# Altium PCB TIDA-01486E1_PCB.PcbDoc (part 3 of 3)
Units mil, origin at the board's own origin, x right, y up, seen from the top; angles counter-clockwise.
Board outline 4100 x 3000 mil, 4 copper layers (Top Layer, Signal Layer 1, Signal Layer 2, Bottom Layer), stack 61.6 mil thick; 140 components, 71 nets, 368 pads, 137 vias.
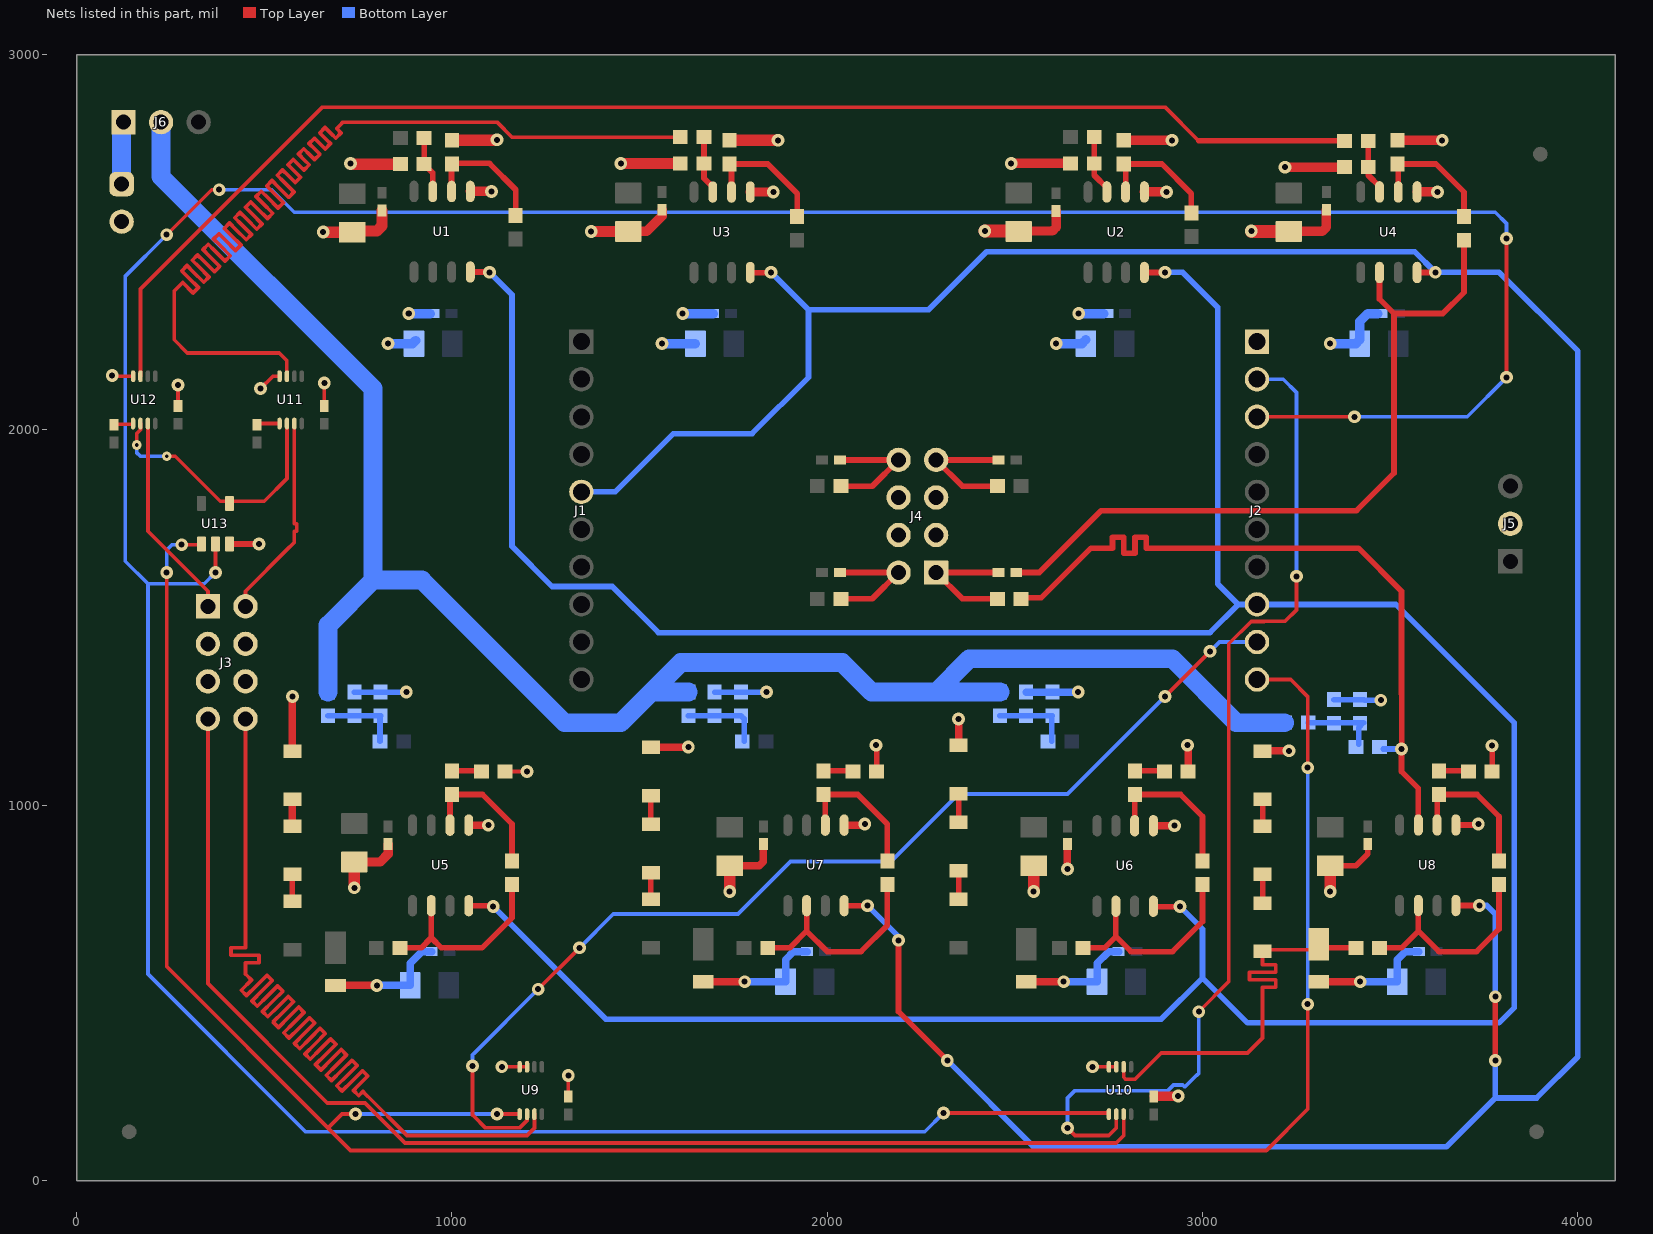
[diagram p4: the nets of this part, all layers, seen from the top]

## Via types
v1: diameter 34, hole 16, Top Layer to Bottom Layer, 129 vias
v2: diameter 40, hole 20, Top Layer to Bottom Layer, 6 vias
v3: diameter 26, hole 10, Top Layer to Bottom Layer, 2 vias

## Nets (pads, with @x,y where several pads share a name; then routed paths per layer and width w, separated by ;. In a path a pad name is that pad's centre, name@x,y a point inside that pad or via, vN(x,y) a via of type N, cw(c..) or ccw(c..) an arc to the next point about the centre after c; other vN are vias at no path point) (continued)
CH2_T: C3.2 U11.3 | length 3678.5
  Top Layer w10: U11.3@560,2143 560,2185 540,2205 295,2205 260,2240 260,2370 282.81,2392.81 310.55,2365.06 324.69,2379.2 296.95,2406.95 280.13,2423.77 294.27,2437.92 311.09,2421.09 338.84,2393.35 352.98,2407.49 325.23,2435.23 308.41,2452.06 322.55,2466.2 339.38,2449.38 367.12,2421.63 381.26,2435.77 353.52,2463.52 336.69,2480.34 350.84,2494.48 367.66,2477.66 395.41,2449.91 409.55,2464.06 381.8,2491.8 364.98,2508.63 379.12,2522.77 395.94,2505.94 423.69,2478.2 437.83,2492.34 410.09,2520.09 393.26,2536.91 407.4,2551.05 424.23,2534.23 451.97,2506.48 466.12,2520.62 438.37,2548.37 421.55,2565.19 435.69,2579.34 452.51,2562.51 480.26,2534.77 494.4,2548.91 466.65,2576.65 449.83,2593.48 463.97,2607.62 480.8,2590.8 508.54,2563.05 522.68,2577.19 494.94,2604.94 478.12,2621.76 492.26,2635.9 509.08,2619.08 536.83,2591.34 550.97,2605.48 523.22,2633.22 506.4,2650.05 520.54,2664.19 537.37,2647.37 565.11,2619.62 579.25,2633.76 551.51,2661.51 534.68,2678.33 548.83,2692.47 565.65,2675.65 582.45,2658.85 596.59,2672.99 579.79,2689.79 562.97,2706.62 577.11,2720.76 593.93,2703.93 605.76,2692.11 619.9,2706.25 608.08,2718.08 591.25,2734.9 605.39,2749.04 622.22,2732.22 634.04,2720.39 648.18,2734.54 636.36,2746.36 619.54,2763.18 633.68,2777.33 650.5,2760.5 662.33,2748.68 676.47,2762.82 664.64,2774.64 647.82,2791.47 661.96,2805.61 678.79,2788.79 690.61,2776.96 704.75,2791.11 692.93,2802.93 700,2810 710,2820 1120,2820 1160,2780 C3.2@1608.5,2780
CH3_IN: C23.2 R32.2 U8.3 | length 1955.1
  Top Layer w15: C23.2@2516.5,1550 2516.5,1552.37 2570,1552.37 2702.63,1685 2745,1685 2760,1685 2760,1714.5 2790,1714.5 2790,1685 2790,1670.96 2820,1670.96 2820,1685 2820,1714.5 2850,1714.5 2850,1685 2995,1685 3415,1685 3530,1570 3530,1296.66 3530.88,1295.78 3530.88,1150.88 v1(3530,1150) 3530,1090 3575,1045 U8.3@3575,947.28
  Bottom Layer w15: R32.2@3481.5,1150 v1(3530,1150)
CH3_OUT: R8.2 R35.1 U4.6 | length 2015.3
  Top Layer w15: R35.1@2503.62,1620 2565,1620 2730,1785 3410,1785 3510,1885 3510,2310 ; U4.6@3471.5,2419.52 3471.5,2348.5 3510,2310 ; R8.2@3696.5,2505.31 3696.5,2366.5 3640,2310 3510,2310
CH3_R: D4.1 D14.2 R42.2 U10.2 | length 1140.6
  Top Layer w10: U10.2@2789.84,302.99 2789.84,275.16 2795,270 2820,270 2890,340 3120,340 3160,380 3160,405 3160,515 3194.89,515 3194.89,535 3160,535 3125.11,535 3125.11,555 3160,555 3194.89,555 3194.89,575 3160,575 3160,585 3160,615 D4.1@3315.2,615
  Top Layer w15: D4.1@3315.2,615 3320.2,620 R42.2@3408.5,620
CH3_T: C4.2 U12.3 | length 3678.2
  Top Layer w10: U12.3@170.47,2143.31 170.47,2375.47 655,2860 2900,2860 2990,2770
  Top Layer w15: 2990,2770 C4.2@3378.5,2770
EVM_CH0_IN: J3.8 U9.7 | length 3386.3
  Top Layer w10: J3.8@450,1230 450,1020 450,620 411.68,620 411.68,600 450,600 486.07,600 486.07,580 450,580 450,560 450,550 451.8,548.2 465.94,534.06 438.85,506.96 452.99,492.82 480.09,519.91 507.18,547.01 521.32,532.87 494.23,505.77 467.13,478.68 481.28,464.54 508.37,491.63 535.46,518.72 549.61,504.58 522.51,477.49 495.42,450.39 509.56,436.25 536.65,463.35 563.75,490.44 577.89,476.3 550.8,449.2 523.7,422.11 537.84,407.97 564.94,435.06 592.03,462.16 606.18,448.01 579.08,420.92 551.99,393.82 566.13,379.68 593.22,406.78 620.32,433.87 634.46,419.73 607.37,392.63 580.27,365.54 594.41,351.4 621.51,378.49 648.6,405.59 662.74,391.44 635.65,364.35 608.56,337.26 622.7,323.11 649.79,350.21 676.89,377.3 691.03,363.16 663.93,336.07 636.84,308.97 650.98,294.83 678.08,321.92 705.17,349.02 719.31,334.88 692.22,307.78 665.12,280.69 679.27,266.55 706.36,293.64 733.45,320.73 747.6,306.59 720.5,279.5 693.41,252.4 707.55,238.26 734.64,265.36 761.74,292.45 775.88,278.31 748.79,251.21 737.66,240.09 751.8,225.94 762.93,237.07 770,230 775.24,224.76 775.52,224.76 880.28,120 1200,120 1219.84,139.84 U9.7@1219.84,177.01
EVM_CH0_OUT: J3.2 U11.7 | length 553.2
  Top Layer w10: J3.2@450,1530 450,1570 565,1685 572.07,1692.07 580.16,1700.16 580.16,1710.16 580.16,1730.16 586.31,1730.16 586.31,1750.16 580.16,1750.16 580.16,1815 U11.7@580.16,2017.01
EVM_CH1_IN: J3.7 U10.7 | length 3386.3
  Top Layer w10: J3.7@350,1230 350,525 668.12,206.88 768.12,206.88 875,100 2770,100 2789.84,119.84 U10.7@2789.84,177.01
EVM_CH1_OUT: J3.1 U12.7 | length 553.2
  Top Layer w10: U12.7@190.16,2017.01 190.16,1729.84 350,1570 J3.1@350,1530
EXT_VBIAS: J6.1 J7.1 | length 167.1
  Bottom Layer w50: J7.1@120,2655 120,2815 J6.1@125,2820
GND: C9.2 C10.2 C11.2 C12.2 C13.2 C14.2 C15.2 C16.2 C17.2 C18.2 C19.2 C20.2 C27.1 C28.1 C29.1 C30.1 C31.2 C32.2 C33.2 C34.2 C35.2 C36.2 C37.2 C38.2 C39.2 C40.1 C41.2 C42.1 C43.2 C44.1 C45.2 C46.1 C47.2 C48.2 C49.2 C50.2 C51.2 C52.2 C53.2 C54.2 C55.2 C56.2 C57.2 C58.2 D1.2 D2.2 D3.2 D4.2 D7.1 D10.1 D13.1 D16.1 J2.1 J3.3 J3.4 J3.5 J3.6 J4.3 J4.4 J4.5 J4.6 J5.2 J7.2 R1.1 R2.1 R3.1 R4.1 R9.1 R10.1 R11.1 R12.1 R25.1 R26.1 R27.1 R28.1 U1.1 U2.1 U3.1 U4.1 U5.1 U6.1 U7.1 U8.1 U9.3 U9.4 U10.3 U10.4 U11.4 U12.4 U13.3 | length 6917.7
  Top Layer w10: v1@85,2142.99 U12.4@150.47,2142.99 ; C56.2@270,2063.62 v1(270,2120) ; v1(490,2110) 522.99,2142.99 U11.4@540.79,2142.99 ; C55.2@660,2063.62 v1(660,2125) ; v1(1132.99,302.99) U9.4@1180.47,302.99 U9.3@1200.16,302.99 ; C47.2@1141.5,1090 v1(1200,1090) ; C57.2@1310,223.62 v1(1310,280) ; v1(2707.01,302.99) U10.4@2750.47,302.99 U10.3@2770.16,302.99
  Top Layer w15: U13.3@407.4,1695.87 v1(485.87,1695.87) ; v1(2130,1160) 2131.5,1158.5 C49.2@2131.5,1090 ; C58.2@2870,223.62 C58.2@2871.38,225 ; C46.1@3340,838.82 3408.82,838.82 3440,870 C45.2@3440,896.38 ; U8.1@3675,947.28 v1@3737.28,947.28 ; C50.2@3771.5,1090 v1(3771.5,1158.5)
  Top Layer w20: D7.1@575,1150 v1(575,1290) ; D1.2@690,519.8 v1(800,519.8) ; U5.1@1045,946.97 v1(1096.97,946.97) ; D13.1@1530,1154.47 1629.47,1154.47 v1(1630,1155) ; D3.2@1670,529.8 v1@1779.8,529.8 ; C44.1@1740,838.82 1818.82,838.82 1830,850 C43.2@1830,896.38 ; U7.1@2045,946.97 v1@2096.97,946.97 ; D10.1@2350,1158.74 v1(2350,1230) ; D2.2@2530,529.8 v1@2629.8,529.8 ; v1(2640,830) C41.2@2640,896.38 ; U6.1@2869.04,945.43 v1(2925.43,945.43) ; C48.2@2961.5,1090 v1@2961.5,1158.5 ; D16.1@3170.53,1145 v1@3225,1145 ; D4.2@3310,529.8 3310.2,530 v1(3420,530)
  Top Layer w25: C40.1@740,848.82 808.82,848.82 830,870 C39.2@830,896.38 ; U1.1@1049.04,2635.43 v1(1105.43,2635.43) ; C29.1@1470,2528.82 1518.82,2528.82 1560,2570 C14.2@1560,2586.38 ; U3.1@1795,2633.77 v1(1856.23,2633.77) ; v1(2490,2710) R2.1@2648.5,2710 ; C28.1@2508.82,2530 2600,2530 2610,2540 C12.2@2610,2583.18 ; R10.1@2800,2771.5 v1(2918.5,2771.5) ; U2.1@2845,2634.09 v1(2904.09,2634.09) ; C58.2@2871.38,225 v1(2935,225) ; v1(3220,2700) R4.1@3378.5,2700 ; C30.1@3230,2528.82 3318.82,2528.82 3330,2540 C16.2@3330,2586.38 ; R12.1@3520,2771.5 v1(3638.5,2771.5) ; U4.1@3571.5,2634.09 v1(3625.91,2634.09)
  Top Layer w30: v1(656.97,2526.97) C27.1@734.36,2526.97 737.39,2530 800,2530 814.04,2544.04 C10.2@814.04,2584.84 ; v1(730,2710) 731.85,2708.15 R1.1@862.86,2708.15 ; v1(740,780) C40.1@740,848.82 ; R9.1@1000,2771.5 1118.5,2771.5 v1(1120,2772.99) ; v1(1371.18,2528.82) C29.1@1470,2528.82 ; v1(1450,2710) R3.1@1608.5,2710 ; v1(1740,770) C44.1@1740,838.82 ; R11.1@1740,2771.5 v1(1868.5,2771.5) ; v1(2550,770) C42.1@2550,838.82 ; v1(3340,770) C46.1@3340,838.82
  Top Layer w35: v1(2420,2530) C28.1@2508.82,2530 ; v1@3131.18,2528.82 C30.1@3230,2528.82
  Bottom Layer w15: R25.1@740,1301.5 C51.2@810,1301.5 v1(878.5,1301.5) ; R27.1@1700,1301.5 v1(1838.5,1301.5) ; R28.1@3350.07,1281.5 3430.26,1281.5 3431.75,1280 v1(3475,1280)
  Bottom Layer w20: v1(800,519.8) 888.62,519.8 C35.2@888.82,520 888.82,578.82 920,610 C17.2@946.38,610 ; v1(1780,530) C37.2@1888.82,530 1888.82,588.82 1910,610 C19.2@1946.38,610 ; R26.1@2530,1301.5 v1(2668.5,1301.5) ; v1(2630,530) C36.2@2718.82,530 2718.82,578.82 2750,610 C18.2@2776.38,610 ; v1(3420,530) C38.2@3518.82,530 3518.82,588.82 3540,610 C20.2@3576.38,610
  Bottom Layer w25: v1(830,2230) 895.03,2230 C31.2@903.18,2238.15 ; v1(885,2310) C9.2@942.59,2310 ; v1(1560,2230) C33.2@1648.82,2230 ; v1(1615,2310) C13.2@1696.38,2310 ; v1(2610,2230) 2678.82,2230 C32.2@2688.82,2240 ; v1(2670,2310) C11.2@2736.38,2310 ; v1(3340,2230) 3408.82,2230 3418.82,2240 3418.82,2288.82 3440,2310 C15.2@3466.38,2310
  other v1: 2100,950 3734.57,950 3230,1145 2960,1160 95,2145 3130,2530
NetC1_1: C1.1 R1.2 U1.3 | length 152.3
  Top Layer w15: C1.1@925.85,2778.15 R1.2@925.85,2708.15 949.04,2684.96 U1.3@949.04,2635.43
NetC2_1: C2.1 R2.2 U2.3 | length 159.8
  Top Layer w15: C2.1@2711.5,2780 R2.2@2711.5,2710 2711.5,2678.5 2745,2645 U2.3@2745,2634.09
NetC3_1: C3.1 R3.2 U3.3 | length 156
  Top Layer w15: C3.1@1671.5,2780 R3.2@1671.5,2710 1671.5,2670.66 1695,2647.16 U3.3@1695,2633.77
NetC4_1: C4.1 R4.2 U4.3 | length 148.3
  Top Layer w15: C4.1@3441.5,2770 R4.2@3441.5,2700 3441.5,2678.5 3471.5,2648.5 U4.3@3471.5,2634.09
NetC23_1: C23.1 J4.1 R35.2 | length 360.4
  Top Layer w15: C23.1@2455,1550 C23.1@2453.5,1550 2360,1550 J4.1@2290,1620 R35.2@2456.38,1620
NetC24_1: C24.1 J4.7 R36.2 | length 360.4
  Top Layer w15: C24.1@2455,1850 C24.1@2453.5,1850 2360,1850 J4.7@2290,1920 R36.2@2456.38,1920
NetC25_2: C25.2 J4.2 R37.1 | length 334
  Top Layer w15: R37.1@2035,1620 J4.2@2190,1620 2120,1550 C25.2@2040,1550
NetC26_2: C26.2 J4.8 R38.1 | length 334
  Top Layer w15: R38.1@2035,1920 J4.8@2190,1920 2120,1850 C26.2@2040,1850
NetC47_1: C47.1 R17.1 | length 79.1
  Top Layer w15: R17.1@1000,1091.5 1077.01,1091.5 C47.1@1078.5,1090
NetC48_1: C48.1 R18.1 | length 79.1
  Top Layer w15: R18.1@2820,1091.5 2897.01,1091.5 C48.1@2898.5,1090
NetC49_1: C49.1 R19.1 | length 77
  Top Layer w15: R19.1@1990,1091.5 C49.1@2067.01,1091.5
NetC50_1: C50.1 R20.1 | length 79.1
  Top Layer w15: R20.1@3630,1091.5 3707.01,1091.5 C50.1@3708.5,1090
NetC51_1: C51.1 R21.2 R25.2 R29.1 | length 207
  Bottom Layer w15: R21.2@670,1238.5 760,1238.5 C51.1@810,1238.5 ; R29.1@808.5,1170 C51.1@808.5,1237.01
NetC52_1: C52.1 R22.2 R26.2 R30.1 | length 207
  Bottom Layer w15: R22.2@2460,1238.5 R26.2@2530,1238.5 C52.1@2600,1238.5 ; R30.1@2598.5,1170 C52.1@2598.5,1237.01
NetC53_1: C53.1 R23.2 R27.2 R31.1 | length 212
  Bottom Layer w15: R23.2@1630,1238.5 C53.1@1770,1238.5 1778.5,1230 R31.1@1778.5,1170
NetC54_1: C54.1 R24.2 R28.2 R32.1 | length 210
  Bottom Layer w15: R24.2@3281.5,1220 3428.76,1220 3416,1207.24 R32.1@3416,1162.5
NetD5_1: D5.1 D6.2 | length 75
  Top Layer w15: D5.1@575,740 D6.2@575,815
NetD6_1: D6.1 D7.2 | length 70.5
  Top Layer w20: D6.1@575,944.47 D7.2@575,1015
NetD8_1: D8.1 D9.2 | length 70.5
  Top Layer w15: D8.1@2350,749.47 D9.2@2350,820
NetD9_1: D9.1 D10.2 | length 77.6
  Top Layer w15: D10.2@2345,1030 2350,1025 D9.1@2350,954.47
NetD11_1: D11.1 D12.2 | length 60.5
  Top Layer w15: D11.1@1530,749.47 D12.2@1530,810
NetD12_1: D12.1 D13.2 | length 75.5
  Top Layer w15: D12.1@1530,949.47 D13.2@1530,1025
NetD14_1: D14.1 D15.2 | length 60
  Top Layer w15: D14.1@3160,745 D15.2@3160,805
NetD15_1: D15.1 D16.2 | length 77.6
  Top Layer w15: D16.2@3155,1010 3160,1005 D15.1@3160,934.47
NetR5_1: R5.1 R9.2 U1.2 | length 330.8
  Top Layer w15: U1.2@999.04,2635.43 R9.2@999.04,2709.04 ; R9.2@1006.25,2714.76 1011.01,2710 1100,2710 1170,2640 1170,2585.92 R5.1@1164.04,2579.96
NetR6_1: R6.1 R10.2 U2.2 | length 323.6
  Top Layer w15: U2.2@2795,2634.09 R10.2@2795,2703.5 ; R10.2@2800,2708.5 2891.5,2708.5 2970,2630 R6.1@2970,2578.3
NetR7_1: R7.1 R11.2 U3.2 | length 351
  Top Layer w15: U3.2@1745,2633.77 1745,2703.5 R11.2@1740,2708.5 1841.5,2708.5 1920,2630 R7.1@1920,2568.3
NetR8_1: R8.1 R12.2 U4.2 | length 347.8
  Top Layer w15: U4.2@3521.5,2634.09 3521.5,2707.01 R12.2@3520,2708.5 3621.5,2708.5 3696.5,2633.5 R8.1@3696.5,2568.3
NetR13_1: R13.1 R17.2 U5.2 | length 374.6
  Top Layer w15: U5.2@995,946.97 995,1023.5 R17.2@1000,1028.5 1081.5,1028.5 1160,950 R13.1@1160,851.5
NetR13_2: R13.2 R39.1 U5.6 | length 527.9
  Top Layer w15: R39.1@861.5,620 918.19,620 945,646.81 ; U5.6@945,732.4 945,646.81 ; R13.2@1160,788.5 1160,700 1080,620 971.81,620 945,646.81
NetR14_1: R14.1 R18.2 U6.2 | length 406.2
  Top Layer w15: U6.2@2819.04,945.43 2819.04,1027.55 R18.2@2820,1028.5 2941.5,1028.5 3000,970 R14.1@3000,851.5
NetR14_2: R14.2 R40.1 U6.6 | length 560
  Top Layer w15: R40.1@2681.5,620 2739.13,620 2769.04,649.91 ; U6.6@2769.04,730.87 2769.04,649.91 ; R14.2@3000,788.5 3000,690 2920,610 2808.95,610 2769.04,649.91
NetR15_1: R15.1 R19.2 U7.2 | length 384.6
  Top Layer w15: R19.2@1990,1028.5 2081.41,1028.5 2160,949.91 R15.1@2160,851.5 ; U7.2@1995,946.97 R19.2@1995,1023.5
  Top Layer w20: R19.2@1990,1028.5 R19.2@1995,1023.5
NetR15_2: R15.2 R41.1 U7.6 | length 564.8
  Top Layer w15: R41.1@1841.5,620 1900,620 1945,665 ; U7.6@1945,732.4 1945,665 ; R15.2@2160,788.5 2160,680 2090,610 2000,610 1945,665
NetR16_1: R16.1 R20.2 U8.2 | length 386
  Top Layer w15: U8.2@3625,947.28 3625,1023.5 R20.2@3630,1028.5 3731.5,1028.5 3790,970 R16.1@3790,851.5
NetR16_2: R16.2 R42.1 U8.6 | length 571
  Top Layer w15: R42.1@3471.5,620 3530,620 3575,665 ; U8.6@3575,732.72 3575,665 ; R16.2@3790,788.5 3790,670 3730,610 3630,610 3575,665
NetR43_2: R43.2 U11.5 | length 57.1
  Top Layer w10: R43.2@483.71,2017.01 U11.5@540.79,2017.01
NetR44_2: R44.2 U12.5 | length 50.5
  Top Layer w10: R44.2@100,2014.76 U12.5@150.47,2014.76
NetU11_6: U11.6 U12.6 U13.4 | length 707.2
  Top Layer w10: v3(160,1960) 160,1990 170.47,2000.47 U12.6@170.47,2017.01 ; v3(240,1930) 262.68,1930 382.68,1810 500,1810 560.47,1870.47 U11.6@560.47,2017.01
  Bottom Layer w10: v3(160,1960) 160,1940 170,1930 v3(240,1930)
PD1: J2.8 U1.8 U2.8 U5.8 U6.8 | length 8844.3
  Top Layer w15: U5.8@1045,732.4 v1@1107.6,732.4 ; U1.8@1049.04,2420.87 v1@1099.13,2420.87 ; U2.8@2845,2419.52 v1@2899.52,2419.52 ; U6.8@2869.04,730.87 2869.91,730 v1(2940,730)
  Bottom Layer w15: v1(1100,2420) 1160,2360 1160,1690 1267.15,1582.85 1427.15,1582.85 1550,1460 3020,1460 3095,1535 ; v1(1110,730) 1410,430 2890,430 3000,540 ; v1(2900,2420) 2946.8,2420 3040,2326.8 3040,1590 3095,1535 ; v1(2940,730) 3000,670 3000,540 ; 3000,540 3120,420 3790,420 3830,460 3830,1220 3515,1535 J2.8@3145,1535 3095,1535
PD2: J1.5 U3.8 U4.8 U7.8 U8.8 | length 8301
  Top Layer w15: U3.8@1795,2419.2 v1@1849.2,2419.2 ; U7.8@2045,732.4 v1(2107.6,732.4) ; v1(2190,640) 2190,450 v1(2320,320) ; U4.8@3571.5,2419.52 v1@3619.52,2419.52 ; U8.8@3675,732.72 v1(3737.28,732.72) ; v1(3780,320) v1(3780,490)
  Bottom Layer w15: J1.5@1345,1835 1435,1835 1590,1990 1800,1990 1950,2140 1950,2320 ; v1(1850,2420) 1950,2320 ; v1(2107.6,732.4) 2190,650 v1(2190,640) ; v1(2320,320) 2550,90 3650,90 3780,220 ; v1(3737.28,732.72) 3757.28,732.72 3780,710 v1(3780,490) ; v1(3780,320) 3780,220 ; 1950,2320 2270,2320 2425,2475 3565,2475 v1(3620,2420) 3790,2420 4000,2210 4000,330 3890,220 3780,220
S1: J2.9 U9.6 | length 2890.2
  Top Layer w10: v1(1055,305) 1055,175 1060,170 1089.63,140.37 1180.37,140.37 1200.16,160.16 U9.6@1200.16,177.01 ; v1(1230,510) v1(1340,620) ; v1(2900,1290) v1(3020,1410)
  Bottom Layer w10: v1(1055,305) 1055,335 1060,340 v1(1230,510) ; v1(1340,620) 1430,710 1762,710 1902,850 2170,850 2350,1030 2640,1030 v1(2900,1290) ; v1(3020,1410) 3045,1435 J2.9@3145,1435
S2: J2.10 U9.5 U13.1 | length 6277.1
  Top Layer w10: v1(240,1620) 240,570 670,140 ; v1(280,1694.13) 330.87,1694.13 U13.1@332.6,1695.87 ; v1(742.99,177.01) 707.01,177.01 670,140 ; v1(1120,177.01) U9.5@1180.47,177.01 ; J2.10@3145,1335 3235,1335 3280,1290 v1(3280,1100) ; v1(3280,470) 3280,190 3170,80 730,80 670,140
  Bottom Layer w10: v1(240,1620) 240,1680 254.13,1694.13 v1(280,1694.13) ; v1(742.99,177.01) v1(1120,177.01) ; v1(3280,470) v1(3280,1100)
S3: J2.2 U10.6 | length 2739.2
  Top Layer w10: v1(2640,140) 2660,120 2750,120 2770.16,140.16 U10.6@2770.16,177.01 ; v1(2990,450) 3070,530 3070,1430 3129.65,1489.65 3163.79,1489.65 3164.14,1490 3220,1490 3250,1520 v1(3250,1610)
  Bottom Layer w10: v1(2640,140) 2640,220 2659,239 2906.75,239 2922.63,254.87 2947.37,254.87 2952.62,249.62 2985,282 ; 2986,281 2990,285 v1(2990,450) ; J2.2@3145,2135 3215,2135 3250,2100 v1(3250,1610)
S4: J2.3 U10.5 U13.2 | length 9840.8
  Top Layer w10: v1(240,2520) 360,2640 v1(380,2640) ; v1(370,1620) U13.2@370,1695.87 ; v1(2310,180) 2747.48,180 U10.5@2750.47,177.01 ; J2.3@3145,2035 v1(3405,2035) ; v1(3810,2140) v1(3810,2510)
  Bottom Layer w10: v1(240,2520) 130,2410 129.87,2410 129.87,1650.13 190,1590 ; v1(370,1620) 340,1590 190,1590 ; v1(380,2640) 520,2640 580,2580 3780,2580 3810,2550 v1(3810,2510) ; v1(2310,180) 2260,130 610,130 190,550 190,1590 ; v1(3405,2035) 3705,2035 v1(3810,2140)
VBIAS: J6.2 R21.1 R22.1 R23.1 R24.1 | length 4857.5
  Bottom Layer w50: J6.2@225,2815 225,2675 790,2110 790,1600 ; R21.1@670,1301.5 670,1480 790,1600 ; R23.1@1630,1301.5 1531.5,1301.5 ; R22.1@2460,1301.5 2290,1301.5 ; R24.1@3218.5,1220 3090,1220 2920,1390 2378.5,1390 2290,1301.5 ; 790,1600 920,1600 1300,1220 1450,1220 1531.5,1301.5 ; 1531.5,1301.5 1610,1380 2040,1380 2118.5,1301.5 2290,1301.5
pads on no net: FID1.1 FID2.1 FID3.1 J1.2 J1.3 J1.4 J1.6 J1.7 J1.8 J1.9 J1.10 J2.4 J2.5 J2.6 J2.7 U1.5 U2.5 U3.5 U4.5 U5.5 U6.5 U7.5 U8.5 U11.1 U12.1

## Polygon pours and split planes (outlines as drawn)
GND on Signal Layer 2 "SIGNAL_LAYER_2_GND_P016" (solid, remove dead copper, pour order 16): 0,3000 4100,3000 4100,0 0,0
-15V on Signal Layer 2 "SIGNAL_LAYER_2_-15V_P002" (solid, remove dead copper, pour order 2): 3750,1810 3900,1810 3900,2780 610,2780 610,2590 3750,2590
+15V on Signal Layer 2 "SIGNAL_LAYER_2_+15V_P004" (solid, remove dead copper, pour order 4): 3900,1690 3900,1405 3470,1405 3470,2200 1023.57,2200 1023.57,2480 2360,2480 3660,2480 3660,1690
3.3V on Signal Layer 2 "SIGNAL_LAYER_2_3.3V_P006" (solid, remove dead copper, pour order 6): 1400,2200 390,2200 390,2880 20,2880 20,80 3300,80 3300,230 160,230 160,1765 840,1765 840,2060 160,2060 160,2720 270,2720 270,2130 1400,2130
-15V on Signal Layer 2 "SIGNAL_LAYER_2_-15V_P012" (solid, remove dead copper, pour order 12): 3750,1810 3950,1810 3950,1060 610,1060 610,880 4050,880 4050,1910 3750,1910
+15V on Signal Layer 2 "SIGNAL_LAYER_2_+15V_P014" (solid, remove dead copper, pour order 14): 930,595 4050,595 4050,380 930,380
GND on Signal Layer 1 "SIGNAL_LAYER_1_GND_P008" (solid, remove dead copper, pour order 8): 0,0 4100,0 4100,3000 0,3000

## Keep-outs
Keep-Out Layer:
  text ".Layer_Name" at 577,-858.49 h60

## Other copper
Top Layer:
  text ".Layer_Name" at 577,-858.49 h60
Bottom Layer:
  text ".Layer_Name" at 577,-858.49 h60
Multi-Layer:
  pour cut-out: 925,2670 1025,2670 1025,2595 925,2595
  pour cut-out: 875,2460 975,2460 975,2385 875,2385
  pour cut-out: 1622,2458 1722,2458 1722,2383 1622,2383
  pour cut-out: 1672,2668 1772,2668 1772,2593 1672,2593
  pour cut-out: 2671,2459 2771,2459 2771,2384 2671,2384
  pour cut-out: 2721,2669 2821,2669 2821,2594 2721,2594
  pour cut-out: 3398,2459 3498,2459 3498,2384 3398,2384
  pour cut-out: 3448,2669 3548,2669 3548,2594 3448,2594
  pour cut-out: 3501,772 3601,772 3601,697 3501,697
  pour cut-out: 3551,982 3651,982 3651,907 3551,907
  pour cut-out: 2695,770 2795,770 2795,695 2695,695
  pour cut-out: 2745,980 2845,980 2845,905 2745,905
  pour cut-out: 1871,772 1971,772 1971,697 1871,697
  pour cut-out: 1921,982 2021,982 2021,907 1921,907
  pour cut-out: 873,771 973,771 973,696 873,696
  pour cut-out: 923,981 1023,981 1023,906 923,906

## Silkscreen, mask and mechanical layers (free items; w line width, h text height)
Top Overlay:
  text "EXT" at 50,2900 h72.83
  text "Vb" at 190,2900 h72.83
  text "+3.3V" at 285,2900 h72.83
  text "V+" at 175,2635 h72.83
  text "GND" at 175,2555 h72.83
  text "GND" at 2940.96,2220.92 h72.83
  text "+3.3V" at 1110,2220 h72.83
  text "S3" at 3210,2120 h72.83
  text "S4" at 3210,2010 h72.83
  text "CH0" at 2045,1995 h72.83
  text "CH1" at 2315,1995 h72.83
  text "-15V" at 3600,1840 h72.83
  text "PD2" at 1160,1810 h72.83
  text "GND" at 1980,1760 h72.83
  text "GND" at 2360,1760 h72.83
  text "GND" at 3610,1730 h72.83
  text "+15V" at 3590,1620 h72.83
  text "EVM_CONN" at 410,1600 h72.83
  text "CH1OUT" at 20,1510 h72.83
  text "CH0OUT" at 530,1510 h72.83
  text "PD1" at 3210,1510 h72.83
  text "CH2" at 2045,1465 h72.83
  text "CH3" at 2310,1460 h72.83
  text "S1" at 3210,1410 h72.83
  text "GND" at 110,1360 h72.83
  text "GND" at 530,1360 h72.83
  text "S2" at 3210,1320 h72.83
  text "CH0IN" at 520,1215 h72.83
  text "CH1IN" at 100,1210 h72.83
  text ".Layer_Name" at 577,-858.49 h60
Bottom Overlay:
  region: 2060,2135 1760,2135 1760,2035 2060,2035
  text "'.PRJ_Number'.PCB_Rev-" at 2745,2055 h108.27
  text ".Layer_Name" at 577,-858.49 h60
Top Paste:
  text ".Layer_Name" at 577,-858.49 h60
Bottom Paste:
  text ".Layer_Name" at 577,-858.49 h60
Top Solder:
  text ".Layer_Name" at 577,-858.49 h60
  text ".Layer_Name" at 577,-858.49 h60
Bottom Solder:
  text ".Layer_Name" at 577,-858.49 h60
Drill Guide:
  text ".Layer_Name" at 577,-858.49 h60
M1 Board Outline:
  lines w10: 0,0 0,3000 4100,3000 4100,2900 4100,0 0,0
  text ".Layer_Name" at 577,-858.49 h60
M2 Board Dimensions:
  rectangle: 0,-275 125,-150
  rectangle: 125,-400 500,-275
  lines w7: 0,-275 1000,-275 ; 125,-400 125,-150 ; 250,-400 250,-150 ; 500,-400 500,-150 ; 750,-400 750,-150 ; 0,-400 1000,-400 1000,-150 0,-150 0,-400
  text ".Layer_Name" at 577,-858.49 h60
M3 3D STEP Top:
  text ".Layer_Name" at 577,-858.49 h60
M4 3D STEP Bottom:
  text ".Layer_Name" at 577,-858.49 h60
M5 Assembly Top:
  lines w10: -292,-930.17 6308,-930.17 ; -292,-726.83 6310,-726.83 ; -292,-523.5 -292,-1133.5 3713,-1133.5 6310,-1133.5 6310,-523.5 -291.5,-523.5 -291.5,-1133.5 1284,-1133.5 ; 2173,-1133.5 2173,-523.5 ; 3440,-726.83 3440,-523.5 ; 4280,-726.83 4280,-523.5 ; 4902,-1140 4902,-937.17
  text "COMPONENTS MARKED 'DNP' SHOULD NOT BE POPULATED." at 1153.5,-318.5 h60
  text "ASSEMBLY VARIANT:" at 1153,-434 h60
  text ".VariantName" at 2189,-434 h60
  text "PCB VIEWED FROM TOP SIDE" at -228.5,-655.67 h60
  text "BOARD #:" at 2248,-655.67 h60
  text ".PRJ_Number" at 2793.5,-655.67 h60
  text "REV:" at 3638,-655.67 h60
  text ".PCB_Rev" at 3929.5,-655.67 h60
  text "SVN REV:" at 4476,-655.67 h60
  text ".VersionControl_RevNumber" at 4982,-655.67 h60
  text "TID #:" at 2248,-859 h60
  text ".TID" at 2793.5,-859 h60
  text "PLOT NAME =" at -228.5,-1064.34 h60
  text ".plot_File_Name" at 577,-1064.34 h60
  text "GENERATED    :" at 2250,-1064.34 h60
  text ".Print_Date" at 3119.5,-1064.34 h60
  text ".Print_Time" at 3848.5,-1064.34 h60
  text "TEXAS INSTRUMENTS" at 5113,-1064.34 h60
M6 Assembly Bottom:
  lines w10: -292.5,-727.33 6309.5,-727.33 ; -290.5,-930.67 6309.5,-930.67 ; 1115.5,-1140.5 1115.5,-937.67 ; 1737.5,-727.33 1737.5,-524 ; 2577.5,-727.33 2577.5,-524 ; 3844.5,-1134 3844.5,-524 ; 4733.5,-1134 6309,-1134 6309,-524 -292.5,-524 -292.5,-1134 2304.5,-1134 6309.5,-1134 6309.5,-524
  text "COMPONENTS MARKED 'DNP' SHOULD NOT BE POPULATED." at 6102,-318 h60
  text ".VariantName" at 5058,-434 h60
  text "ASSEMBLY VARIANT:" at 6097,-434 h60
  text ".VersionControl_RevNumber" at 1035.5,-656.17 h60
  text "SVN REV:" at 1541.5,-656.17 h60
  text ".PCB_Rev" at 2088,-656.17 h60
  text "REV:" at 2379.5,-656.17 h60
  text ".PRJ_Number" at 3224,-656.17 h60
  text "BOARD #:" at 3769.5,-656.17 h60
  text "PCB VIEWED FROM BOTTOM SIDE" at 6246,-656.17 h60
  text ".TID" at 3224,-859.5 h60
  text "TID #:" at 3769.5,-859.5 h60
  text "TEXAS INSTRUMENTS" at 904.5,-1064.84 h60
  text ".Print_Time" at 2169,-1064.84 h60
  text ".Print_Date" at 2898,-1064.84 h60
  text "GENERATED    :" at 3767.5,-1064.84 h60
  text ".plot_File_Name" at 5440.5,-1064.84 h60
  text "PLOT NAME =" at 6246,-1064.84 h60
M9 Title Sheet:
  drawing of 57 lines, arcs and shapes, not listed
  text "1" at 739.84,8036.5 h70
  text "2" at 3235.5,8036.5 h70
  text "3" at 5724.84,8036.5 h70
  text "4" at 8231.51,8036.5 h70
  text "5" at 10730.5,8036.5 h70
  text "6" at 13235.5,8036.5 h70
  text "A" at -416.5,6893.5 h70
  text "A" at 14383.5,6893.5 h70
  text "B" at -416.5,4513.5 h70
  text "B" at 14383.5,4513.5 h70
  text "C" at -416.5,2138.5 h70
  text "C" at 14383.5,2138.5 h70
  text "PROJECT TITLE:" at 11343.5,277.5 h45
  text ".PRJ_Title" at 11393.5,144.17 h70
  text "DESIGNED FOR:" at 11343.5,-23.5 h45
  text ".PRJ_Customer" at 11393.5,-163.5 h70
  text "D" at -416.5,-231.5 h70
  text "D" at 14383.5,-231.5 h70
  text "FILE NAME:" at 11343.5,-323.5 h45
  text ".PCB_File_Name_No_Path" at 11393.5,-443.5 h70
  text "Texas Instruments (TI) and/or its licensors do not warrant the accuracy or completeness of this specification" at 6374,-605.34 h45
  text "ENGINEER:" at 11343.5,-613.5 h45
  text "LAYOUT BY:" at 12848.5,-613.5 h45
  text "or any information contained therein. TI and/or its licensors do not warrant that this design will meet" at 6329.01,-718 h45
  text ".PRJ_Engineer" at 11393.5,-768.49 h70
  text ".PCB_Layout" at 12899,-768.49 h70
  text "the specifications, will be suitable for your application or fit for any particular purpose, or will operate in" at 6329.01,-830.67 h45
  text ".Layer_Name" at 577,-858.49 h60
  text "ALTIUM DESIGNER VERSION:" at 12848.5,-923.5 h45
  text "an implementation. TI and/or its licensors do not warrant that the design is production worthy. You should" at 6329.01,-943.33 h45
  text "completely validate and test your design implementation to confirm the system functionality for your application." at 6374,-1056 h45
  text ".print_Scale" at 11393.5,-1056.83 h70
  text ".Application_BuildNumber" at 12899,-1056.83 h70
  text "1" at 739.84,-1263.5 h70
  text "2" at 3235.5,-1263.5 h70
  text "3" at 5724.84,-1263.5 h70
  text "4" at 8231.51,-1263.5 h70
  text "5" at 10730.5,-1263.5 h70
  text "6" at 13235.5,-1263.5 h70
M10 Fab Notes:
  drawing of 189 lines, arcs and shapes, not listed
  text "DESIGN INFORMATION" at 12382.02,6356.17 h60
  text "MIN. TRACK WIDTH:" at 11737.46,6224.05 h60
  text "8" at 12833.7,6224.05 h60
  text "MIL" at 12988.46,6224.05 h60
  text "MIN. CLEARANCE:" at 11737.46,6099.92 h60
  text "0.2" at 12773.7,6099.93 h60
  text "mm" at 12988.46,6099.92 h60
  text "MIN. VIA PAD SIZE:" at 11737.46,5975.8 h60
  text "24" at 12803.71,5975.8 h60
  text "MIL" at 12988.46,5975.8 h60
  text "0.05mm (2MIL)" at 12432.46,5845.9 h60
  text "MINIMUM ANNULAR RING" at 11408.23,5837.67 h60
  text "EXTERNAL" at 13140.46,5837.67 h60
  text "PER" at 11608.23,5727.55 h60
  text "IPC-D-275 CLASS 2 LEVEL C" at 11828.23,5727.54 h60
  text "MIL, HOLES" at 13316.46,5627.07 h60
  text "+/-" at 12924,5618.48 h60
  text "+/-" at 13778,5618.48 h60
  text "REGISTRATION TOLERANCES:" at 11408.23,5617.42 h60
  text "METAL" at 12608,5617.42 h60
  text "5" at 13184.2,5617.42 h60
  text "3" at 14017.2,5617.42 h60
  text "MIL" at 14133.46,5617.42 h60
  text "HOLE SIZE TOLERANCE (UNLESS OTHERWISE SPECIFIED):" at 11408.23,5519.1 h60
  text "+/-" at 13778,5516.23 h60
  text "3" at 14017.2,5515.17 h60
  text "MIL" at 14133.46,5515.17 h60
  text "MATERIAL:" at 11333.46,5377.52 h60
  text "FR-4 High Tg" at 12319.9,5249 h60
  text "X" at 12175.46,5241.01 h60
  text "FR-408" at 11754.46,5236.49 h60
  text "OTHER" at 13242.46,5236.49 h60
  text "62 MIL (1.6mm) +/-10%" at 12074.56,5093.46 h60
  text "X" at 11954.46,5091.01 h60
  text "THICKNESS:" at 11408.23,5085.24 h60
  text "OTHER" at 13359.46,5085.24 h60
  text "TOLERANCE:" at 11408.23,4946.92 h60
  text "X" at 12256.46,4946.92 h60
  text "ANSI IPC-6012 TYPE 3 CLASS 2" at 12434.48,4946.92 h60
  text "OTHER +/-" at 12434.46,4802.73 h60
  text "BOW & TWIST:" at 11408.23,4657.54 h60
  text "X" at 12256.46,4657.54 h60
  text "ANSI IPC-6012 TYPE 3 CLASS 2" at 12434.48,4657.54 h60
  text "OTHER +/-" at 12434.46,4510.85 h60
  text "DRILLING:" at 11333.46,4380.23 h60
  text "NC_DRILL FILES" at 13094.46,4275.04 h60
  text "REFERENCE:" at 11408.23,4271.1 h60
  text "X" at 12065.46,4271.01 h60
  text "AS SHOWN" at 12243.46,4271.1 h60
  text "X" at 12966.46,4271.1 h60
  text "OTHER" at 13392.46,4128.85 h60
  text "PTH COPPER THICKNESS:" at 11407.91,4125.32 h60
  text "X" at 12547.14,4125.32 h60
  text "20-30 um" at 12675.14,4125.32 h60
  text "BOARD FINISH:" at 11333.46,3977.73 h60
  text "SILKSCREEN:" at 11488.68,3867.6 h60
  text "X" at 12446.46,3867.6 h60
  text "TOP" at 12563.46,3867.6 h60
  text "X" at 12956.46,3867.6 h60
  text "BOTTOM" at 13074.46,3867.6 h60
  text "SILKSCREEN COLOR:" at 11488.68,3712.41 h60
  text "X" at 12445.46,3712.41 h60
  text "WHITE" at 12563.46,3712.41 h60
  text "OTHER" at 13074.46,3712.41 h60
  text "X" at 12576.46,3568.96 h60
  text "GREEN" at 12694.46,3568.96 h60
  text "OTHER" at 13312.46,3568.96 h60
  text "SOLDER RESIST COLOR:" at 11488.68,3562.1 h60
  text "X" at 12576.46,3414.71 h60
  text "MATTE" at 12694.46,3414.71 h60
  text "SEMI-GLOSS" at 13312,3414.07 h60
  text "IMMERSION GOLD (ENIG)" at 12394.46,3241.94 h60
  text "ENEPIG" at 13732,3234.72 h60
  text "SURFACE FINISH:" at 11333.46,3233.72 h60
  text "X" at 12216.46,3233.72 h60
  text "IMM. TIN/SILVER OR EQUIV" at 11663,3096.4 h60
  text "OTHER" at 13094.46,3092.47 h60
  text "ARRAY/PANEL:" at 11333.46,2937.09 h60
  text "CUT AND TRIM PER M1 BOARD OUTLINE" at 12394.46,2928.87 h60
  text "N.C. ROUTE" at 12394.46,2792.9 h60
  text "X" at 13082.46,2792.9 h60
  text "V. SCORE" at 13260.46,2792.9 h60
  text "CERTIFICATION:" at 11333.46,2663.77 h60
  text "MATERIALS AND WORKMANSHIP FOR ALL PCBS" at 12058.46,2663.77 h60
  text "TO MEET OR EXCEED THE REQUIREMENTS OF:" at 12058.46,2569.71 h60
  text "X" at 11695.97,2441.08 h60
  text "ANSI IPC-A-600F CLASS ->" at 11823.96,2441.08 h60
  text "X" at 13471.97,2441.08 h60
  text "2" at 13581.96,2441.08 h60
  text "1" at 13266.96,2439.58 h60
  text "3" at 13935.96,2439.58 h60
  text "X" at 12507.97,2293.39 h60
  text "RoHS" at 12635.96,2293.39 h60
  text "OTHER" at 13280.36,2293.39 h60
  text "PER ORDER" at 13677.42,2293.39 h60
  text "ALL BOARDS MUST MEET OR EXCEED UL94-V0 REQUIREMENTS." at 11361,2139.57 h60
  text "PCB MUST BEAR THE UL94V-0 UL REGISTERED MATERIAL ID NUMBER" at 11361,2023.5 h60
  text "ADDITIONAL REQUIREMENTS:" at 11333.46,1854.08 h60
  text "MICROSECTION:" at 11408.23,1746.95 h60
  text "YES" at 12313.96,1746.95 h60
  text "REQUIRED" at 13175.46,1602.62 h60
  text "BARE BOARD ELEC. TEST:" at 11408.23,1599.76 h60
  text "NONE" at 12713.96,1599.76 h60
  text "X" at 13057.46,1599.76 h60
  text "PER ORDER" at 13767.46,1599.76 h60
  text "XX MIL VIAS REQUIRE NON-CONDUCTIVE FILL AND PLANARIZE" at 11576.38,1394.82 h59
  text "XX MIL VIAS REQUIRE CONDUCTIVE FILL AND PLANARIZE" at 11584.38,1290.84 h60
  text "OUTER XX MIL VIAS REQUIRE 50 OHM SINGLE-ENDED IMPEDANCE" at 11583.39,1127.46 h58
  text "LAYER 2 & 3 (INNER LAYERS) XX MIL WIDE, XX MIL SPACE / TRACES REQUIRE 100 OHM DIFFERENTIAL IMPEDANCE" at 11575.39,891.74 h60
  text ".Layer_Name" at 577,-858.49 h60
  text ".Layer_Name" at 570,-970 h60
M11 Gerber Information:
  lines w10: -292,-930.17 6308,-930.17 ; -292,-726.83 6310,-726.83 ; -292,-523.5 -292,-1133.5 3713,-1133.5 6310,-1133.5 6310,-523.5 -291.5,-523.5 -291.5,-1133.5 1284,-1133.5 ; 2173,-1133.5 2173,-523.5 ; 3440,-726.83 3440,-523.5 ; 4280,-726.83 4280,-523.5 ; 4902,-1140 4902,-937.17
  text "ALL ARTWORK VIEWED FROM TOP SIDE" at -228.5,-655.67 h60
  text "BOARD #:" at 2248,-655.67 h60
  text ".PRJ_Number" at 2793.5,-655.67 h60
  text "REV:" at 3638,-655.67 h60
  text ".PCB_Rev" at 3929.5,-655.67 h60
  text "SVN REV:" at 4476,-655.67 h60
  text ".VersionControl_RevNumber" at 4982,-655.67 h60
  text "LAYER NAME =" at -228.5,-858.49 h60
  text "TID #:" at 2248,-859 h60
  text ".TID" at 2793.5,-859 h60
  text "PLOT NAME =" at -228.5,-1064.34 h60
  text ".plot_File_Name" at 577,-1064.34 h60
  text "GENERATED    :" at 2250,-1064.34 h60
  text ".Print_Date" at 3119.5,-1064.34 h60
  text ".Print_Time" at 3848.5,-1064.34 h60
  text "TEXAS INSTRUMENTS" at 5113,-1064.34 h60
M12 Stackup:
  drawing of 191 lines, arcs and shapes, not listed
  text "Layer" at 9790.34,7830 h60
  text "Name" at 10200.26,7830 h60
  text "Material" at 11130,7830 h60
  text "Thickness" at 11989.77,7830 h60
  text "Constant" at 12639.6,7830 h60
  text "Board Layer Stack" at 13209.46,7830 h60
  text "1" at 9790.34,7710 h60
  text "Top Overlay" at 10200.26,7710 h60
  text "2" at 9790.34,7590 h60
  text "Top Solder" at 10200.26,7590 h60
  text "Solder Resist" at 11130,7590 h60
  text "0.40mil" at 11989.77,7590 h60
  text "3.5" at 12639.6,7590 h60
  text "3" at 9790.34,7470 h60
  text "Top Layer" at 10200.26,7470 h60
  text "Copper" at 11130,7470 h60
  text "1.40mil" at 11989.77,7470 h60
  text "4" at 9790.34,7350 h60
  text "Dielectric1" at 10200.26,7350 h60
  text "FR-4" at 11130,7350 h60
  text "59.20mil" at 11989.77,7350 h60
  text "4.8" at 12639.6,7350 h60
  text "5" at 9790.34,7230 h60
  text "Bottom Layer" at 10200.26,7230 h60
  text "Copper" at 11130,7230 h60
  text "1.40mil" at 11989.77,7230 h60
  text "6" at 9790.34,7110 h60
  text "Bottom Solder" at 10200.26,7110 h60
  text "Solder Resist" at 11130,7110 h60
  text "0.40mil" at 11989.77,7110 h60
  text "3.5" at 12639.6,7110 h60
  text "7" at 9790.34,6990 h60
  text "Bottom Overlay" at 10200.26,6990 h60
  text ".Layer_Name" at 577,-858.49 h60
M13 Component Bodies Top:
  text ".Layer_Name" at 577,-858.49 h60
M14 Component Bodies Bottom:
  text ".Layer_Name" at 577,-858.49 h60
M15 Courtyards Top:
  text ".Layer_Name" at 577,-858.49 h60
M16 Courtyards Bottom:
  text ".Layer_Name" at 577,-858.49 h60
Drill Drawing:
  circle w10: c5348.9,3103.54 r22.14
  lines w10: 5326.76,2926.43 5371.04,2926.43 5348.9,2882.15 5326.76,2926.43 ; 5326.76,2981.77 5371.04,2981.77 5371.04,3026.05 5326.76,3026.05 5326.76,2981.77 ; 5326.76,3192.09 5337.83,3192.09 5348.9,3181.02 5359.97,3192.09 5371.04,3192.09 5359.97,3203.16 5371.04,3214.23 5359.97,3214.23 5348.9,3225.3 5337.83,3214.23 5326.76,3214.23 5337.83,3203.16 5326.76,3192.09 ; 5326.76,3280.64 5348.9,3291.71 5371.04,3280.64 5359.97,3302.78 5371.04,3324.92 5348.9,3313.85 5326.76,3324.92 5337.83,3302.78 5326.76,3280.64
  lines w12: 5286,2852.27 8398.94,2852.27 ; 5286,3350.38 8398.94,3350.38 ; 5601.63,2752.64 5601.63,3450 ; 5918.82,2752.64 5918.82,3450 ; 6540.56,2752.64 6540.56,3450 ; 6784.88,2752.64 6784.88,3450 ; 7145.22,2752.64 7145.22,3450 ; 7854.73,2752.64 7854.73,3450 ; 5286,2752.64 8398.94,2752.64 8398.94,3450 5286,3450 5286,2752.64
  text "Symbol" at 5345.77,3380.26 h72
  text "Quantity" at 5631.52,3380.26 h72
  text "Finished Hole Size" at 5948.7,3380.26 h72
  text "Plated" at 6570.45,3380.26 h72
  text "Hole Type" at 6814.77,3380.26 h72
  text "Drill Layer Pair" at 7175.11,3380.26 h72
  text "Hole Tolerance" at 7884.62,3380.26 h72
  text "2" at 5631.52,3280.64 h60
  text "10.00mil (0.254mm)" at 5948.7,3280.64 h60
  text "PTH" at 6570.45,3280.64 h60
  text "Round" at 6814.77,3280.64 h60
  text "Top Layer - Bottom Layer" at 7175.11,3280.64 h60
  text "129" at 5631.52,3181.02 h60
  text "16.00mil (0.406mm)" at 5948.7,3181.02 h60
  text "PTH" at 6570.45,3181.02 h60
  text "Round" at 6814.77,3181.02 h60
  text "Top Layer - Bottom Layer" at 7175.11,3181.02 h60
  text "6" at 5631.52,3081.4 h60
  text "20.00mil (0.508mm)" at 5948.7,3081.4 h60
  text "PTH" at 6570.45,3081.4 h60
  text "Round" at 6814.77,3081.4 h60
  text "Top Layer - Bottom Layer" at 7175.11,3081.4 h60
  text "24" at 5631.52,2981.77 h60
  text "40.00mil (1.016mm)" at 5948.7,2981.77 h60
  text "PTH" at 6570.45,2981.77 h60
  text "Round" at 6814.77,2981.77 h60
  text "Top Layer - Bottom Layer" at 7175.11,2981.77 h60
  text "20" at 5631.52,2882.15 h60
  text "45.28mil (1.150mm)" at 5948.7,2882.15 h60
  text "PTH" at 6570.45,2882.15 h60
  text "Round" at 6814.77,2882.15 h60
  text "Top Layer - Bottom Layer" at 7175.11,2882.15 h60
  text "181 Total" at 5631.52,2782.53 h60
  text ".Layer_Name" at 577,-858.49 h60
Mechanical 17:
  text ".Layer_Name" at 577,-858.49 h60
Mechanical 18:
  text ".Layer_Name" at 577,-858.49 h60
Mechanical 19:
  text ".Layer_Name" at 577,-858.49 h60

## Dimensions
0,-400 to 1000,-400 on M2 Board Dimensions
0,0 to 0,3000 on M2 Board Dimensions
0,0 to 4100,0 on M2 Board Dimensions

## Text inside footprints (layer, text, board x,y; h text height)
Logo2: Bottom Overlay "Pb" at 3064.6,2871.1 h60
Logo3: Bottom Overlay "For evaluation only; not FCC approved for resale." at 2582.07,2886.1 h60
ZZ1: M5 Assembly Top "Install label in silkscreened box after final wash.  Text shall be 8 pt font.  Text shall be per the Label Table in the PDF schematic." at 350,5468 h40